# Altium PCB PE2.PcbDoc
Units mm, origin at the board's own origin, x right, y up, seen from the top; angles counter-clockwise.
Board outline 152.4 x 101.6 mm, 2 copper layers (Top Layer, Bottom Layer); 61 components, 47 nets, 236 pads, 10 vias.
Unrouted connection lines stored in the file: 137.
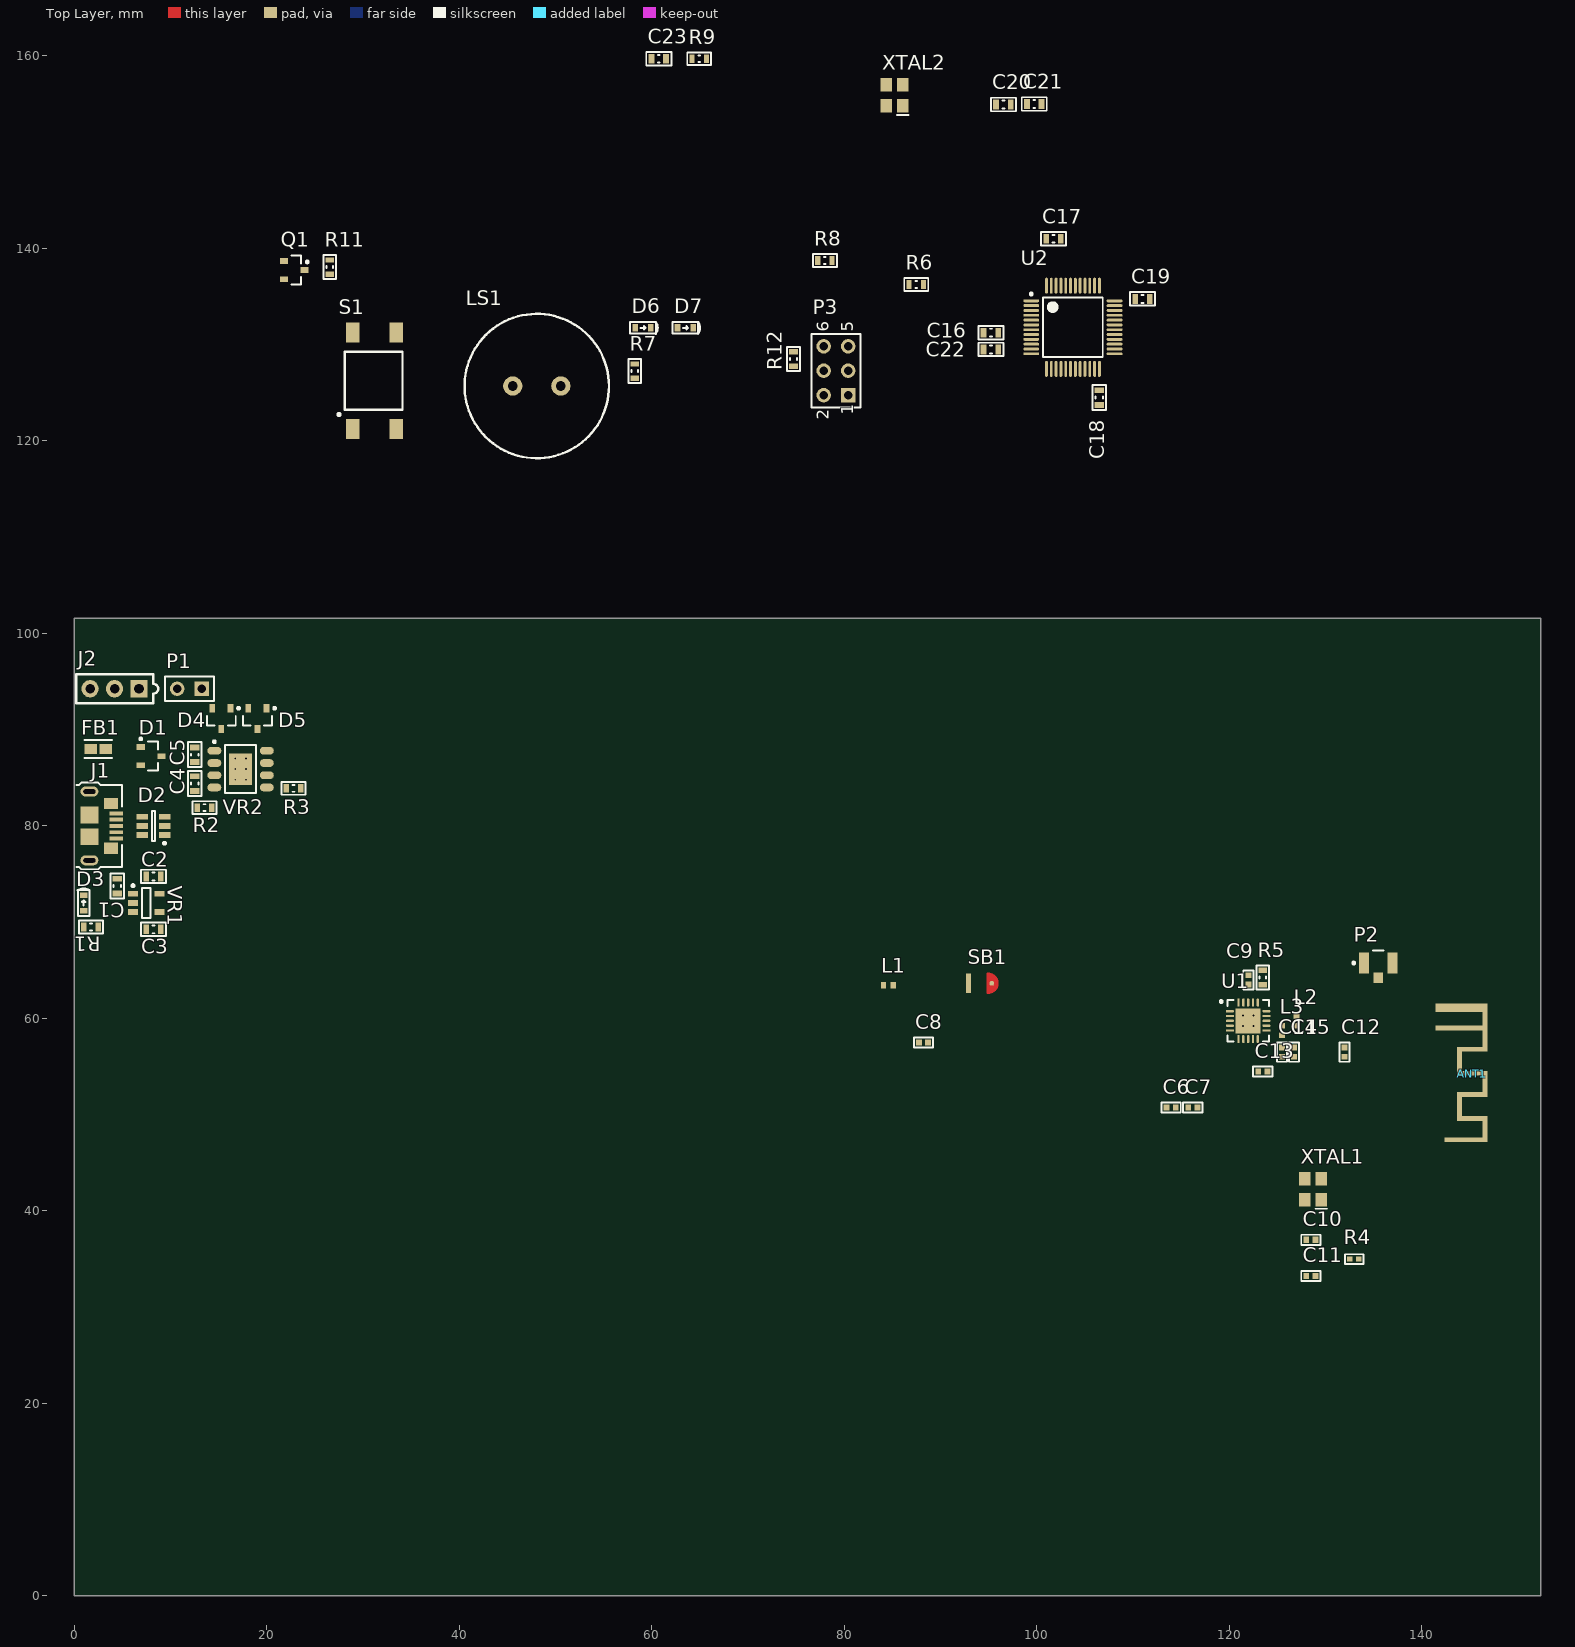
[diagram p0: Top Layer view]
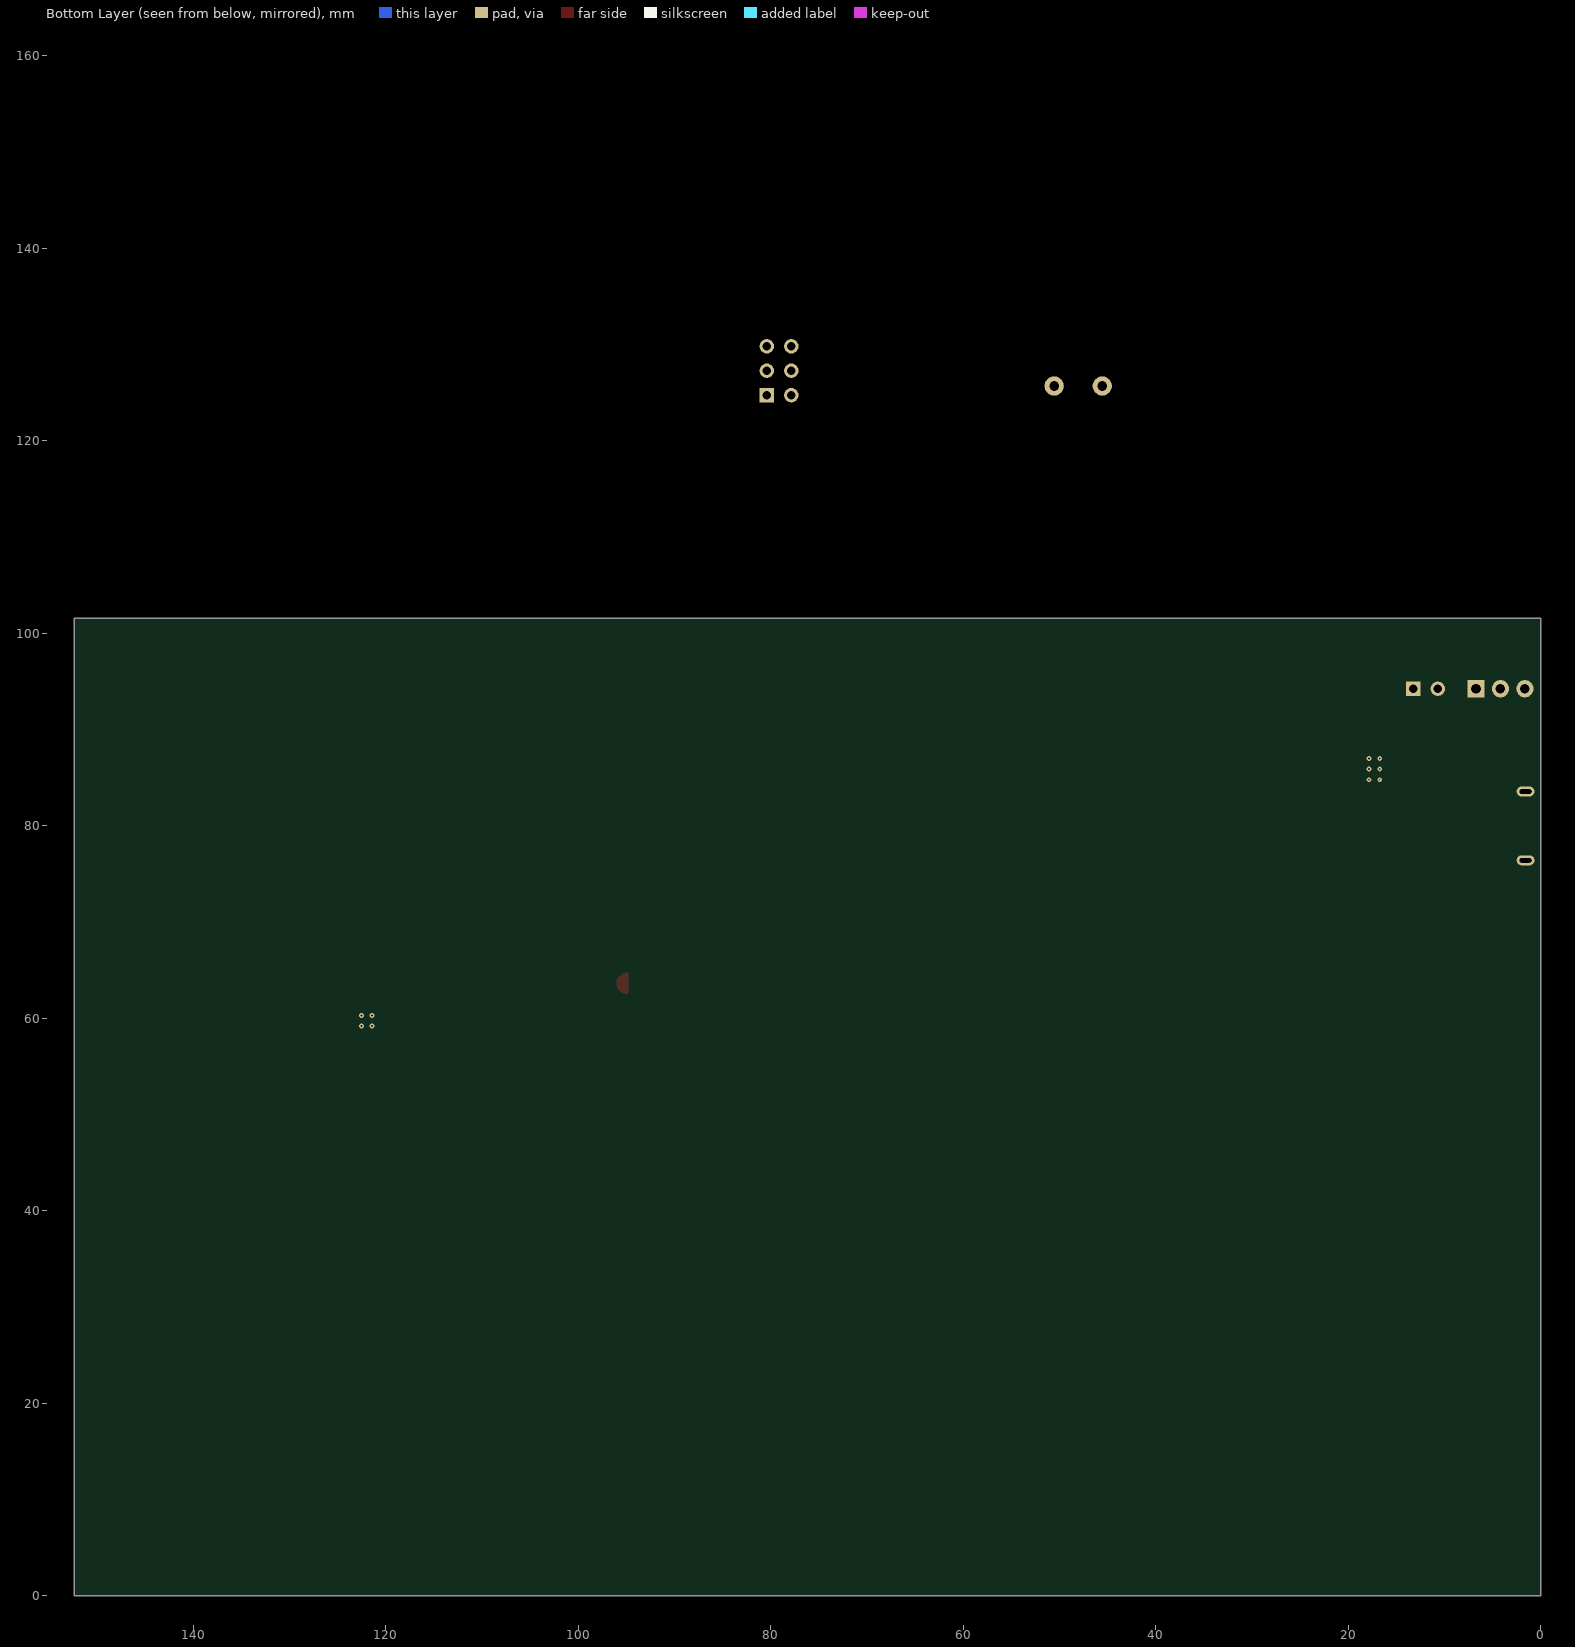
[diagram p1: Bottom Layer view, seen from below]

## Layer stack, top to bottom
Top Solder: solder mask 0.0102, Solder Resist, Dk 3.5
Top Layer: signal copper 0.0356
Dielectric 1: dielectric 0.32, FR-4, Dk 4.8
Bottom Layer: signal copper 0.0356
Bottom Solder: solder mask 0.0102, Solder Resist, Dk 3.5

## Board outline
0,0 152.4,0 152.4,101.6 0,101.6

## Design rules (kind name [scope] priority, off if disabled: settings)
Clearance [All] p1: gap=0.254 ignorepadtopadclearanceinfootprint=FALSE except(0: Arc-Hole Track-Hole SMDPad-Hole THPad-Hole Via-Hole Fill-Hole Poly-Hole Region-Hole Text-Hole)
PolygonConnect [All] p1: connectstyle=Relief reliefconductorwidth=0.254 reliefentries=4 polygonreliefangle="90 Angle" airgapwidth=0.254
RoomDefinition U_POWER [InComponentClass('U_POWER')] p1: confinementstyle=ConfineIn formatcopy=TRUE lockcomponents=FALSE outline 0,65.75 26.25,65.75 26.25,96.11 0,96.11
RoomDefinition U_MCU [InComponentClass('U_MCU')] p2: confinementstyle=ConfineIn formatcopy=TRUE lockcomponents=FALSE outline 17.4,117.9 118.7,117.9 118.7,163.4 17.4,163.4
RoomDefinition U_RF [InComponentClass('U_RF')] p3: confinementstyle=ConfineIn formatcopy=TRUE lockcomponents=FALSE outline 66.98,30.5 147.48,30.5 147.48,67.8 66.98,67.8
RoutingVias [All] p1: holewidth=0.711 width=1.27 viastyle="Through Hole" minholewidth=0.711 minwidth=1.27 maxholewidth=0.711 maxwidth=1.27
SolderMaskExpansion [All] p1: expansion=0.102 istentingtop=FALSE
Width [All] p1: maxlimit=0.254 minlimit=0.254 preferedwidth=0.254
30 further rules are at their usual default settings.

## Classes and differential pairs
component class U_RF: ANT1 C6 C7 C8 C9 C10 C11 C12 C13 C14 C15 L1 L2 L3 P2 R4 R5 SB1 U1 XTAL1
component class U_POWER: C1 C2 C3 C4 C5 D1 D2 D3 D4 D5 FB1 J1 J2 P1 R1 R2 R3 VR1 VR2
component class U_MCU: C16 C17 C18 C19 C20 C21 C22 C23 D6 D7 LS1 P3 Q1 R6 R7 R8 R9 R11 R12 S1 U2 XTAL2

## Components (designator, comment, footprint, x,y, rotation, side; value= is the part's Value field where it differs from the comment)
ANT1 "PCB Antenna 2.4Ghz 50ohm" "2.4Ghz Antenna" 145.23,54.25 r270 top
C1 "" CAP_0603 4.5,73.75 r270 top value=1uF
C2 "" CAP_0603 8.25,74.75 r0 top value=2.2uF
C3 "" CAP_0603 8.25,69.25 r0 top value=100pF
C4 "" CAP_0603 12.55,84.4 r270 top value=1uF
C5 "" CAP_0603 12.55,87.4 r90 top value=1uF
C6 "0402" CAP_0402 113.98,50.75 r0 top value=10nF
C7 "0402" CAP_0402 116.23,50.75 r0 top value=10nF
C8 "0402" CAP_0402 88.25,57.5 r0 top value=10nF
C9 "0402" CAP_0402 122,64 r270 top value=33nF
C10 "0402" CAP_0402 128.5,37 r0 top value=22pF
C11 "0402" CAP_0402 128.5,33.25 r0 top value=22pF
C12 "0402" CAP_0402 132,56.5 r270 top value=1.5pF
C13 "0402" CAP_0402 123.5,54.5 r180 top value=1pF
C14 "0402" CAP_0402 125.5,56.5 r270 top value=2.2nF
C15 "0402" CAP_0402 126.75,56.5 r270 top value=4.7pF
C16 "" CAP_0603 95.25,129.5 r0 top value=4.7uF
C17 "" CAP_0603 101.76,141 r180 top value=100nF
C18 "" CAP_0603 106.5,124.5 r90 top value=100nF
C19 "" CAP_0603 111,134.75 r180 top value=100nF
C20 "" CAP_0603 96.55,154.95 r0 top value=12pF
C21 "" CAP_0603 99.76,155 r0 top value=12pF
C22 "" CAP_0603 95.25,131.25 r0 top value=100nF
C23 "" CAP_0603 60.75,159.7 r0 top value=100nF
D1 "" SOT-23_L 8,87.25 r0 top
D2 "USBLC6-2SC6" STM-SOT23-6L_V 8.25,80 r180 top
D3 "LED" LED_0603 1,72 r90 top
D4 "" SOT-23_L 15.3,91.15 r270 top
D5 "" SOT-23_L 19.05,91.15 r270 top
D6 "LED" LED_0603 59.125,131.752 r0 top
D7 "LED" LED_0603 63.525,131.752 r0 top
FB1 "BLM18PG121SN1D" FP-BLM18-0_15-t0_8-IPC_A 2.5,88 r0 top
J1 "USB B micro" "USB Micro B" 3,80 r270 top
J2 "3 pin header" Header_3 6.75,94.25 r90 top
L1 "0402" IND_0402 84.59,63.45 r0 top value=3.9nH
L2 "0402" IND_0402 127,59.75 r90 top value=8.2nH
L3 "0402" IND_0402 125.5,58.75 r270 top value=2.7nH
LS1 "Buzzer" Buzzer 48.077,125.702 r0 top
P1 "Solar" HDR1X2 13.25,94.25 r180 top
P2 "" HRS-U.FL-R-SMT-3_V 135.5,65.75 r0 top
P3 "Header 3X2" HDR2X3 80.425,124.752 r90 top
Q1 "NPN" SOT23_L 22.875,137.752 r0 top
R1 "" RES_0603 1.75,69.5 r0 top value=1k
R2 "" RES_0603 13.55,81.9 r0 top value=10k
R3 "" RES_0603 22.8,83.9 r180 top value=33k
R4 "" RES_0402 133,35 r0 top value=1M
R5 "0402" RES_0603 123.5,64.25 r90 top value=22k
R6 "" RES_0603 87.5,136.25 r0 top value=1.5k
R7 "" RES_0603 58.25,127.25 r90 top value=1k
R8 "" RES_0603 78,138.75 r0 top value=1k
R9 "" RES_0603 64.95,159.7 r0 top value=3.3k
R11 "" RES_0603 26.575,138.052 r90 top value=1k
R12 "" RES_0603 74.75,128.5 r90 top value=1k
S1 "" TactileSwitch6x6 31.225,126.252 r90 top
SB1 "" "Solder bridge RF 0.254" 94.44,63.65 r0 top
U1 "nRF24L01P" "QFN20 4x4" 121.98,59.75 r0 top
U2 "STM32F301C8T6TR" STM-LQFP48_M 103.777,131.802 r0 top
VR1 "AP2202K" SOT23-5 7.5,72 r0 top
VR2 "XC6804A3E1QR-G" SOP127P600-8N 17.3,85.9 r0 top
XTAL1 "16Mhz" 16Mhz_Crystal 128.73,42.25 r90 top
XTAL2 "32Mhz" 16Mhz_Crystal 85.25,155.9 r90 top

## Footprints (in the part's own frame and the unit in brackets; to place one, negate y for a bottom-side part, rotate by r counter-clockwise, add the part's x,y. Pads: shape width x height; smd on the part's side, far side on the other; paste and mask are expansions set on the pad)
"2.4Ghz Antenna" [mm] "PCB Antenna 2.4Ghz, TI AN043"
  rect 5x0.5 smd mask+0.102: 1(-4.8,1.35)
  rect 0.5x4.9 smd mask+0.102: 1(-4.75,-1.35)
  rect 0.5x2.64 smd mask+0.102: 1(-2.55,-0.22) 1(-0.05,-0.22) 1(2.15,-0.22) 1(4.65,-0.22)
  rect 2x0.5 smd mask+0.102: 1(-1.3,-1.29) 1(3.4,-1.29)
  rect 2.7x0.5 smd mask+0.102: 1(1.05,1.35) 1(5.75,1.35)
  rect 0.5x3.94 smd mask+0.102: 1(6.85,-0.87)
  rect 0.9x4.9 smd mask+0.102: 2(-6.85,-1.35)
16Mhz_Crystal [mm] "16Mhz crystal"
  rect 1.4x1.2 smd: 1(-1.1,-0.85) 3(1.1,0.85) GND(-1.1,0.85) GND(1.1,-0.85)
  silkscreen extent -2.02,-1.45 -2.02,-0.25, body extent -1.6,-1.25 1.6,1.25, height 0.6
Buzzer [mm]
  round 2 hole 1: 1(-2.5,0) 2(2.5,0)
  silkscreen extent -7.5,-7.5 7.5,7.5, body extent -7,-7 7,7, height 7.35
CAP_0402 [mm] "Chip Capacitor, 2-Leads, Body 1,00x0,50mm, IPC Medium Density"
  rect 0.6x0.64 smd: 1(-0.48,0) 2(0.48,0)
  silkscreen extent -1,-0.53 1,0.53, body extent -0.5,-0.25 0.5,0.25, height 0.35
CAP_0603 [mm] "Chip Capacitor, 2-Leads, Body 1,55x0,85mm, IPC Medium Density"
  rect 0.6x1 smd: 1(-0.76,0) 2(0.76,0)
  silkscreen extent -1.3,-0.7 1.3,0.7, body extent -0.78,-0.43 0.77,0.42, height 0.45
FP-BLM18-0_15-t0_8-IPC_A [mm]
  rect 1.306x1.058 smd paste+0 mask+0: 1(-0.776,0) 2(0.776,0)
  silkscreen extent -1.43,-0.93 1.43,0.93, body extent -1.93,-1.03 1.93,1.03, height 0.25
HDR1X2 [mm] "Connector; Header; 2 Position"
  rect 1.5x1.5 hole 0.9: 1(0,0)
  round 1.5 hole 0.9: 2(2.54,0)
  silkscreen extent -1.27,-1.27 3.81,1.27
HDR2X3 [mm] "Connector; Header; 3x2 Position"
  rect 1.5x1.5 hole 0.9: 1(0,0)
  round 1.5 hole 0.9: 2(0,2.54) 3(2.54,0) 4(2.54,2.54) 5(5.08,0) 6(5.08,2.54)
  silkscreen extent -1.27,-1.27 6.35,3.81
Header_3 [mm]
  rect 1.8x1.8 hole 1: 1(0,0)
  round 1.8 hole 1: 2(0,2.54) 3(0,5.08)
  silkscreen extent -1.5,-2 1.5,6.5
HRS-U.FL-R-SMT-3_V [mm] "SMT, 3-Leads, Body 2.6x2.6mm"
  rect 1.05x2.2 smd: 1(-1.475,0) 2(1.475,0)
  rect 1x1.05 smd: 3(0,-1.525)
  silkscreen extent -2.67,-0.12 0.55,1.3, body extent -1.3,-1.3 1.3,1.3, height 1.25
IND_0402 [mm] "Chip Inductor, 2-Leads, Body 1,00x0,50mm, IPC Medium Density"
  rect 0.57x0.64 smd: 1(-0.495,0) 2(0.495,0)
  body extent -0.5,-0.25 0.5,0.25, height 0.35
LED_0603 [mm]
  rect 0.6x0.8 smd: 1(-0.819,0) 2(0.8,0)
  silkscreen extent -1.35,-0.61 1.5,0.61, body extent -0.83,-0.35 0.83,0.37, height 0.68
"QFN20 4x4" [mm] "QFN, 20-Leads, Body 4,00x4,00mm, Pitch 0,50mm, Thermal Pad 2,60x2,60mm, IPC Medium Density"
  oval 0.85x0.25 smd: 1(-1.9,1) 2(-1.9,0.5) 3(-1.9,0) 4(-1.9,-0.5) 5(-1.9,-1) 11(1.9,-1) 12(1.9,-0.5) 13(1.9,0) 14(1.9,0.5) 15(1.9,1)
  oval 0.25x0.85 smd: 6(-1,-1.9) 7(-0.5,-1.9) 8(0,-1.9) 9(0.5,-1.9) 10(1,-1.9) 16(1,1.9) 17(0.5,1.9) 18(0,1.9) 19(-0.5,1.9) 20(-1,1.9)
  rect 2.6x2.6 smd: 21(0,0)
  silkscreen extent -2.92,-2.15 2.15,2.15, body extent -2.02,-2.02 2.02,2.02, height 0.95
RES_0402 [mm] "Chip Resistor, 2-Leads, Body 1,00x0,50mm, IPC Medium Density"
  rect 0.55x0.55 smd: 1(-0.475,0) 2(0.475,0)
  silkscreen extent -0.97,-0.5 0.97,0.5, body extent -0.5,-0.25 0.5,0.25, height 0.35
RES_0603 [mm] "Chip Resistor, 2-Leads, Body 1,55x0,85mm, IPC Medium Density"
  rect 0.55x0.9 smd: 1(-0.75,0) 2(0.75,0)
  silkscreen extent -1.24,-0.66 1.24,0.66, body extent -0.78,-0.43 0.77,0.42, height 0.45
"Solder bridge RF 0.254" [mm]
  rect 0.5x2 smd: 1(-1.5,0)
  round 0.5 smd mask+0: 2(0.9,0)
  Top Layer region: 0.5,1 0.5,-1 0.6,-0.9 1,-0.9 1.5,-0.4 1.5,0.4 1,0.9
  Top Layer lines w0.254: 0.5,-1 ccw(c0.5,0) 0.5,1 0.5,-1
SOP127P600-8N [mm]
  oval 1.45x0.8 smd: 1(-2.725,1.905) 2(-2.725,0.635) 3(-2.725,-0.635) 4(-2.725,-1.905) 5(2.725,-1.905) 6(2.725,-0.635) 7(2.725,0.635) 8(2.725,1.905)
  rect 2.4x3.3 smd: 9(0,0)
  silkscreen extent -2.85,-2.5 1.6,2.98, body extent -2,-2.5 2,2.5, height 1.45
SOT23-5 [mm] "SOT23, 5-Leads, Body 3,00x2,85mm, Pitch 0,95mm, IPC Medium Density"
  rect 1.05x0.6 smd: 1(-1.375,0.95) 2(-1.375,0) 3(-1.375,-0.95) 4(1.375,-0.95) 5(1.375,0.95)
  silkscreen extent -1.5,-1.55 0.45,1.92, body extent -1.5,-1.55 1.5,1.55, height 1.3
SOT23_L [mm] "SOT23, 3-Leads, Body 2.9x1.3mm, Pitch 0.95mm, Lead Span 2.3mm - Reverse Pinning, IPC High Density"
  rect 0.85x0.6 smd: 1(1.075,0) 2(-1.075,-0.95) 3(-1.075,0.95)
  silkscreen extent -0.3,-1.5 1.48,1.5, body extent -0.7,-1.5 0.7,1.5, height 1.1
SOT-23_L [mm] "SOT23, 3-Leads, Body 2.9x1.3mm, Pitch 0.95mm, Lead Span 2.5mm, IPC High Density"
  rect 0.85x0.6 smd: 1(-1.075,0.95) 2(-1.075,-0.95) 3(1.075,0)
  silkscreen extent -1.2,-1.5 0.7,1.92, body extent -0.7,-1.5 0.7,1.5, height 1.1
STM-LQFP48_M [mm] "QFP, 48-Leads, Body 7x7mm, Pitch 0.5mm, IPC Low Density"
  oval 1.65x0.3 smd: 1(-4.325,2.75) 2(-4.325,2.25) 3(-4.325,1.75) 4(-4.325,1.25) 5(-4.325,0.75) 6(-4.325,0.25) 7(-4.325,-0.25) 8(-4.325,-0.75) 9(-4.325,-1.25) 10(-4.325,-1.75) 11(-4.325,-2.25) 12(-4.325,-2.75) 25(4.325,-2.75) 26(4.325,-2.25) 27(4.325,-1.75) 28(4.325,-1.25) 29(4.325,-0.75) 30(4.325,-0.25) 31(4.325,0.25) 32(4.325,0.75) 33(4.325,1.25) 34(4.325,1.75) 35(4.325,2.25) 36(4.325,2.75)
  oval 0.3x1.65 smd: 13(-2.75,-4.325) 14(-2.25,-4.325) 15(-1.75,-4.325) 16(-1.25,-4.325) 17(-0.75,-4.325) 18(-0.25,-4.325) 19(0.25,-4.325) 20(0.75,-4.325) 21(1.25,-4.325) 22(1.75,-4.325) 23(2.25,-4.325) 24(2.75,-4.325) 37(2.75,4.325) 38(2.25,4.325) 39(1.75,4.325) 40(1.25,4.325) 41(0.75,4.325) 42(0.25,4.325) 43(-0.25,4.325) 44(-0.75,4.325) 45(-1.25,4.325) 46(-1.75,4.325) 47(-2.25,4.325) 48(-2.75,4.325)
  silkscreen extent -4.45,-3.1 3.1,3.57, body extent -3.5,-3.5 3.5,3.5, height 1.6
STM-SOT23-6L_V [mm] "SOT23, 6-Leads, Body 3.05x1.75mm, Pitch 0.95mm"
  rect 1.2x0.6 smd: 1(-1.15,0.95) 2(-1.15,0) 3(-1.15,-0.95) 4(1.15,-0.95) 5(1.15,0) 6(1.15,0.95)
  silkscreen extent -1.28,-1.55 0.15,1.92, body extent -1.6,-1.53 1.6,1.53, height 1.45
TactileSwitch6x6 [mm]
  rect 2.1x1.4 smd: 1(-5,2.25) 2(5,2.25) 3(-5,-2.25) 4(5,-2.25)
  silkscreen extent -3.64,-2.9 3,3.84, body extent -5,-3 5,3, height 5.07
"USB Micro B" [mm] "USB3076"
  rect 0.4x1.4 smd: 1(-1.3,1.4) 2(-0.65,1.4) 3(0,1.4) 4(0.65,1.4) 5(1.3,1.4)
  rect 1.15x1.45 smd: 6(-2.32,0.83) 7(2.32,0.83)
  oval 1.05x1.85 hole 1.25 slot 0.45 at 0 deg: 8(-3.575,-1.4) 11(3.575,-1.4)
  rect 1.75x1.9 smd: 9(-1.125,-1.4) 10(1.125,-1.4)
  silkscreen extent -4.5,-2.75 4.5,2, body extent -4.05,-4.1 4.05,1.7, height 2.73

## Part data
ANT1: library part "Antenna 2.4Ghz"
C1 C2 C3 C4 C5 C6 C7 C8 C9 C10 C11 C12 C13 C14 C15 C16 C17 C18 C19 C20 C21 C22 C23: library part Cap, "Capacitor", LatestRevisionDate=17-Jul-2002, LatestRevisionNote="Re-released for DXP Platform.", PackageDescription="Radial Cap, Thru-Hole; 2 Leads; 0.3 in Pin Spacing", PackageReference=RAD-0.3, Published=8-Jun-2000, Publisher="Altium Limited"
D1 D4 D5: library part "Diode BAT17", "Silicon RF Schottky Diode for Mixer Applications in the VHF/UHF Range", ComponentLink1Description="Manufacturer Link", ComponentLink1URL=http://www.infineon.com/, ComponentLink2Description=Datasheet, ComponentLink2URL=http://www.infineon.com/upload/Document/cmc_upload/documents/009/363/bat17series.pdf, DatasheetVersion=Oct-1999, LatestRevisionDate=29-May-2009, LatestRevisionNote="IPC-7351 Footprint Added.", Note="Pin 2 is not connected and not drawn.", PackageDescription="3-Pin SOT-23 Package 0.95 mm Pitch, 2.5 mm Lead Span", PackageReference=SOT-23, PackageVersion=Sep-2001, Published=21-Mar-2003, Publisher="Altium Limited"
D2: library part CMP-2000-05378-1, "Very low capacitance ESD protection, 3.5 pF, -40 to 125 degC, 6-Pin SOT23, RoHS, Tape and Reel", Capacitance Value=3.5pF, Clamping Voltage=17V, Leakage Current=0.15uA, Manufacturer=STMicroelectronics, Operating Temp Range=-40Cto125C, Operating Temperature Classification=Automotive, Operating Temperature Max Deg. C=125C, Operating Temperature Min Deg. C=-40C, Package / Case=SOT-23, Package Description="6-Pin Small Outline Transistor, Body 2.925 x 1.625 mm, Pitch 0.95 mm", Package Reference=SOT23-6L, Peak Pulse Current=5A, Reverse Breakdown Voltage=6V, Reverse Stand-off Voltage=5V, Test Current (It)=1mA, Clamping Voltage (Max)=17V, Configuration=Dual, Datasheet URL=http://www.st.com/st-web-ui/static/active/en/resource/technical/document/datasheet/CD00050750.pdf, Datasheet Version="Rev. 5, 10/2011", Direction Type=Uni-Directional, Leakage Current (Max)=0.15uA, Manufacturer URL=http://www.st.com/, Mounting=SurfaceMount, Mounting Style=SurfaceMount, Number of Elements=1, Packaging=TapeandReel, Pin Count=6, Polarity=Uni-Directional, Product Depth (mm)=1.75mm, Product Height (mm)=1.3mm, Product Length (mm)=3.05mm, Rad Hardened=No, Suppressor Type=DiodeArrays, Working Voltage=5V, Working Voltage (Max)=5V
D3 D6 D7: library part LED2, "Typical RED, GREEN, YELLOW, AMBER GaAs LED", LatestRevisionDate=17-Jul-2002, LatestRevisionNote="Re-released for DXP Platform.", PackageDescription="SM LED; 2 Flat Leads", PackageReference=3.2X1.6X1.1, PackageVersion=Feb-2002, Published=8-Jun-2000, Publisher="Altium Limited"
FB1: library part CMP-0686-00557-7, "Chip Ferrite Bead, 0603, 120Ω @ 100MHz, 0.05Ω, 25%, 2A", Case Code (Imperial)=0603, Case Code (Metric)=1608, Current Rating=2A, DC Resistance (DCR)=50mR, Frequency=100MHz, Max Operating Temperature=125°C, Min Operating Temperature=-55°C, Package Quantity=1, Tolerance=25%, Case/Package=0603, Core Material=Ferrite, DC Current=2A, Depth=0.8mm, Height=0.8mm, Impedance=120R, Lead Free="Lead Free", Length=1.6mm, Material=Steel, Max Current Rating=2A, Max DC Current=2A, Number of Circuits=1, Number of Lines=1, Number of Pins=2, Packaging="Tape and Reel", Radiation Hardening=No, REACH SVHC="No SVHC", RoHS Compliant=Yes, Shielding=Unshielded, Termination=SMD/SMT, Test Frequency=100MHz, Width=0.8mm
J1: library part "USB micro B"
J2: library part Header_3
L1 L2 L3: library part Inductor, "Inductor", Code_IEC=1005, Code_JEITA=0402, LatestRevisionDate=29-May-2009, LatestRevisionNote="IPC-7351 Footprint Added.", PackageDescription="Chip Inductor", PackageReference=0402-A, Published=8-Jun-2000, Publisher="Altium Limited"
LS1: "Magnetic Transducer Buzzer", ComponentLink1Description="Manufacturer Link", ComponentLink1URL=http://www.megastar.com/linecard/buzzmode/index.php, DatasheetVersion=17-Dec-2003, LatestRevisionDate=17-Dec-2003, LatestRevisionNote="Schematic revised, PCB Footprint replaced.", PackageDescription="Magnetic Transducer Buzzer", PackageReference=ABSM-1574, Published=24-Mar-1999, Publisher="Altium Limited"
P1: library part "Header 2H", "Header, 2-Pin, Right Angle", LatestRevisionDate=17-Jul-2002, LatestRevisionNote="Re-released for DXP Platform.", Publisher="Altium Limited"
P2: library part CMP-2000-05153-1, "Ultra Small Coaxial Connector, 6 GHz, -40 to 90 degC, 3-Pin SMD, RoHS, Bulk", Dielectric Material=LiquidCrystalPolymer(LCP), Frequency - Max=6GHz, Housing Color=Silver, Manufacturer="Hirose Electric", Operating Temperature=-40degC~90degC, Package Description="3-Pin Surface Mount Device, Body 2.6 x 2.6 mm", Package Reference=U.FL-R-SMT, Standard Package=100, Body Finish=Silver, Body Material=PhosphorBronze, Category=Connectors,Interconnects, Center Contact Material=PhosphorBronze, Center Contact Plating=Gold, Connector Style=U.FL, Connector Type=Jack,MalePin, Contact Termination=Solder, Datasheet URL=https://datasheet.ciiva.com/26945/getdatasheetpartid-475239-26945414.pdf, Datasheet Version=Feb-09, Dynamic Catalog=U.FLSeries, Family=CoaxialConnectors(RF), Fastening Type=Snap-On, Featured Product=HiroseU.FLSeries, Impedance=50Ohm, Manufacturer URL=https://www.hirose.com, Minimum Quantity=UltraMiniatureCoaxial, Mounting Type=SurfaceMount, Online Catalog=U.FLSeries, Other Names="H122041 / U.FL-R-SMT-1(01)-ND", Packaging=Bulk, Quantity Available=Bulk, Series=U.FL, Shield Termination=Solder, Unit PriceUSD=U.FL
P3: "Header, 3-Pin, Dual row", LatestRevisionDate=17-Jul-2002, LatestRevisionNote="Re-released for DXP Platform.", Publisher="Altium Limited"
Q1: "NPN Bipolar Transistor", Code_JEDEC=TO-226-AA, LatestRevisionDate=17-Jul-2002, LatestRevisionNote="Re-released for DXP Platform.", PackageDescription="TO, Flat Index; 3 In-Line, Axial Leads; Body Dia. 4.8mm; Leads 0.55 x 0.51 mm (max)", PackageReference=TO-226-AA, Published=8-Jun-2000, Publisher="Altium Limited"
R1 R2 R4 R5 R6 R7 R8 R9 R11 R12: library part Res2, "Resistor", LatestRevisionDate=17-Jul-2002, LatestRevisionNote="Re-released for DXP Platform.", PackageDescription="Axial Device, Thru-Hole; 2 Leads; 0.4 in Pin Spacing", PackageReference=AXIAL-0.4, Published=8-Jun-2000, Publisher="Altium Limited"
R3: library part Res2, "Determines charging speed => p14. Datasheet                                 40kohm => 200mA max, solar only has 100mA", LatestRevisionDate=17-Jul-2002, LatestRevisionNote="Re-released for DXP Platform.", PackageDescription="Axial Device, Thru-Hole; 2 Leads; 0.4 in Pin Spacing", PackageReference=AXIAL-0.4, Published=8-Jun-2000, Publisher="Altium Limited"
S1: library part "Tactile Switch", "gekruisde schakelaar (1.4 en 2.3)"
SB1: library part "Solder bridge"
U1: "Single Chip Transceiver, 2.4 GHz, 60 mW, 1.9 to 3.6 V, -40 to 85 degC, 20-Pin QFN, RoHS, Tray"
U2: library part CMP-0537-00001-2, "ARM Cortex-M4 32-bit MCU, 64 KB Flash, 16 KB Internal RAM, 37 I/Os, 48-Pin LQFP, -40 to 85 degC, Tape and Reel", I/Os (High Current)=37, Operating Frequency(F) (Processor speed) (MHz)=72, Package Description="48-Pin Low Profile Quad Flat Package, Body 7 x 7 mm, Pitch 0.5 mm", Package Reference=LQFP48, Supply Voltage(Vcc) min (V)=2, ComponentLink1Description="Manufacturer URL", ComponentLink1URL=http://www.st.com/, ComponentLink2Description=Datasheet, ComponentLink2URL=http://www.st.com/st-web-ui/static/active/en/resource/technical/document/datasheet/DM00093332.pdf, Core="ARM Cortex-M4", D/A Converter=1, DatasheetVersion="Rev. 6", FLASH Size (Prog) (kB)=64, Internal RAM Size (kB)=16, Mounting Technology="Surface Mount", Packing="Tape and Reel"
VR1: library part AP2202K-3.3TRG1, "AP2112K-3.3TRG1"
XTAL1 XTAL2: library part Crystal, "Crystal, 16 MHz, SMD, 3.2mm x 2.5mm, 30 ppm, 18 pF, 30 ppm, 7M"

## Via types
v1: diameter 0.5, hole 0.2, Top Layer to Bottom Layer, 10 vias

## Nets (pads, with @x,y where several pads share a name; then routed paths per layer and width w, separated by ;. In a path a pad name is that pad's centre, name@x,y a point inside that pad or via, vN(x,y) a via of type N, cw(c..) or ccw(c..) an arc to the next point about the centre after c; other vN are vias at no path point)
3.3V: C2.2 C6.2 C7.2 C8.2 C16.2 C17.2 C18.2 C19.2 P3.1 R1.2 R6.1 R9.1 U1.7 U1.15 U1.18 U2.9 U2.24 U2.36 U2.48 VR1.5
5V: C1.2 C4.2 D1.3 D4.3 D5.3 R2.1 VR1.1 VR1.3 VR2.8
ANT1: L2.1 L3.1 U1.12
ANT2: L1.1 L2.2 U1.13
BEL: C23.2 R9.2 S1.1 U2.10
BOOT: P3.4 R12.1 U2.44
BUZZ: R11.1 U2.13
GND: ANT1.2 C1.1 C2.1 C3.1 C4.1 C5.1 C6.1 C7.1 C8.1 C9.1 C10.1 C11.1 C13.2 C14.2 C15.2 C16.1 C17.1 C18.1 C19.1 C20.1 C21.1 C22.1 C23.1 D2.2 D3.2 D6.2 D7.2 J1.5 J2.3 P1.2 P2.2 P2.3 P3.6 Q1.3 R3.1 R5.2 R12.2 S1.4 U1.8 U1.14 U1.17 U1.20 U2.8 U2.23 U2.35 U2.47 VR1.2 VR2.3
LED1: R7.2 U2.11
LED2: R8.2 U2.12
NetANT1_1: ANT1.1 C12.1 C13.1
NetC3_2: C3.2 VR1.4
NetC9_2: C9.2 U1.19
NetC10_2: C10.2 R4.1 U1.9 XTAL1.1
NetC11_2: C11.2 R4.2 U1.10 XTAL1.3
NetC12_2: C12.2 L1.2
NetD1_1: D1.1 D2.5 FB1.2
NetD2_1: D2.1 R6.2 U2.33
NetD2_3: D2.3 U2.32
NetD2_4: D2.4 J1.2
NetD2_6: D2.6 J1.3
NetD3_1: D3.1 R1.1
NetD5_1: D5.1 P1.1
NetD6_1: D6.1 R7.1
NetD7_1: D7.1 R8.1
NetFB1_1: FB1.1 J1.1
NetJ2_2: J2.2 VR2.6
NetLS1_2: LS1.2 Q1.1
NetP2_1: P2.1
NetQ1_2: Q1.2 R11.2
NetR2_2: R2.2 VR2.4
NetR3_2: R3.2 VR2.5
NetR5_1: R5.1 U1.16
NetU1_1: U1.1 U2.29
NetU1_2: U1.2 U2.25
NetU1_3: U1.3 U2.26
NetU1_4: U1.4 U2.28
NetU1_5: U1.5 U2.27
NetU1_6: U1.6 U2.30
"OSC IN": C20.2 U2.5 XTAL2.1
"OSC OUT": C21.2 U2.6 XTAL2.3
RESET: C22.2 P3.2 U2.7
SWCLK: P3.5 U2.37
SWDIO: P3.3 U2.34
Vbat: C5.2 D4.1 J2.1 U2.1 VR2.1
VCC: LS1.1
VDD_PA: C14.1 C15.1 L3.2 U1.11
pads on no net: D1.2 D4.2 D5.2 J1.4 J1.6 J1.7 J1.8 J1.9 J1.10 J1.11 S1.2 S1.3 SB1.1 SB1.2 U1.21 U2.2 U2.3 U2.4 U2.14 U2.15 U2.16 U2.17 U2.18 U2.19 U2.20 U2.21 U2.22 U2.31 U2.38 U2.39 U2.40 U2.41 U2.42 U2.43 U2.45 U2.46 VR2.2 VR2.7 VR2.9 XTAL1.GND XTAL2.GND
copper on no net:
  other v1: 121.43,59.2 122.53,59.2 121.43,60.3 122.53,60.3 16.75,84.8 17.85,84.8 16.75,85.9 17.85,85.9 16.75,87 17.85,87

## Silkscreen, mask and mechanical layers (free items; w line width, h text height)
Mechanical 1:
  lines w0.2: 0,0 0,30 50,30 50,0 0,0
Top Assembly:
  text "add measuring points spi2" at 110.254,130.012 h1.52

## Text inside footprints (layer, text, board x,y; h text height)
ANT1: Mechanical 1 "0.5mm" at 145.016,64.375 h1 r270; Mechanical 1 "0.3mm" at 145.216,46.85 h1 r270; Mechanical 1 "0.3mm" at 146.93,57.611 h1; Mechanical 1 "via to GND" at 141.466,66.025 h1 r270; Mechanical 1 "Feed point" at 141.458,58.55 h1 r270
P3: Top Overlay "6" at 78.393,131.356 h1.27 r90; Top Overlay "5" at 80.933,131.356 h1.27 r90; Top Overlay "2" at 78.393,122.212 h1.27 r90; Top Overlay "1" at 80.933,122.72 h1.27 r90